# Altium PCB PCB1.PcbDoc
Units mm, origin at the board's own origin, x right, y up, seen from the top; angles counter-clockwise.
Board outline 152.4 x 101.6 mm, 2 copper layers (Top Layer, Bottom Layer), stack 1.98 mm thick; 19 components, 9 nets, 46 pads, 0 vias.
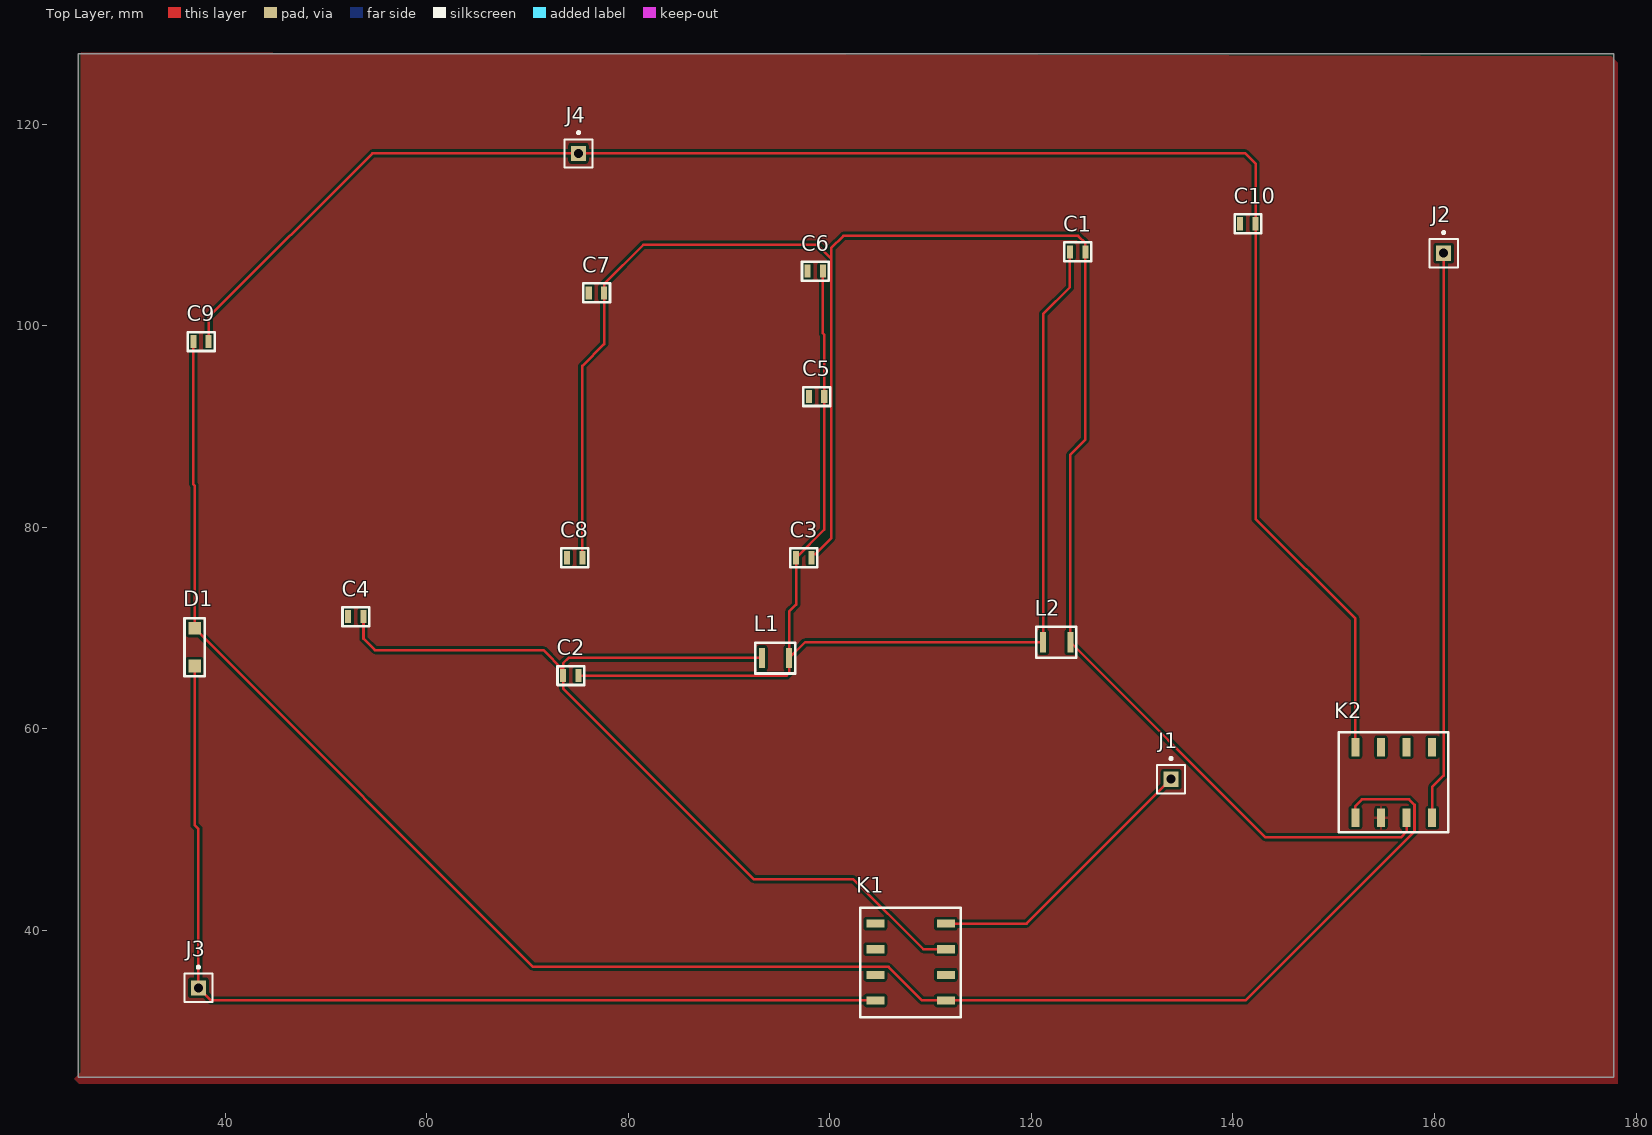
[diagram p0: Top Layer view]
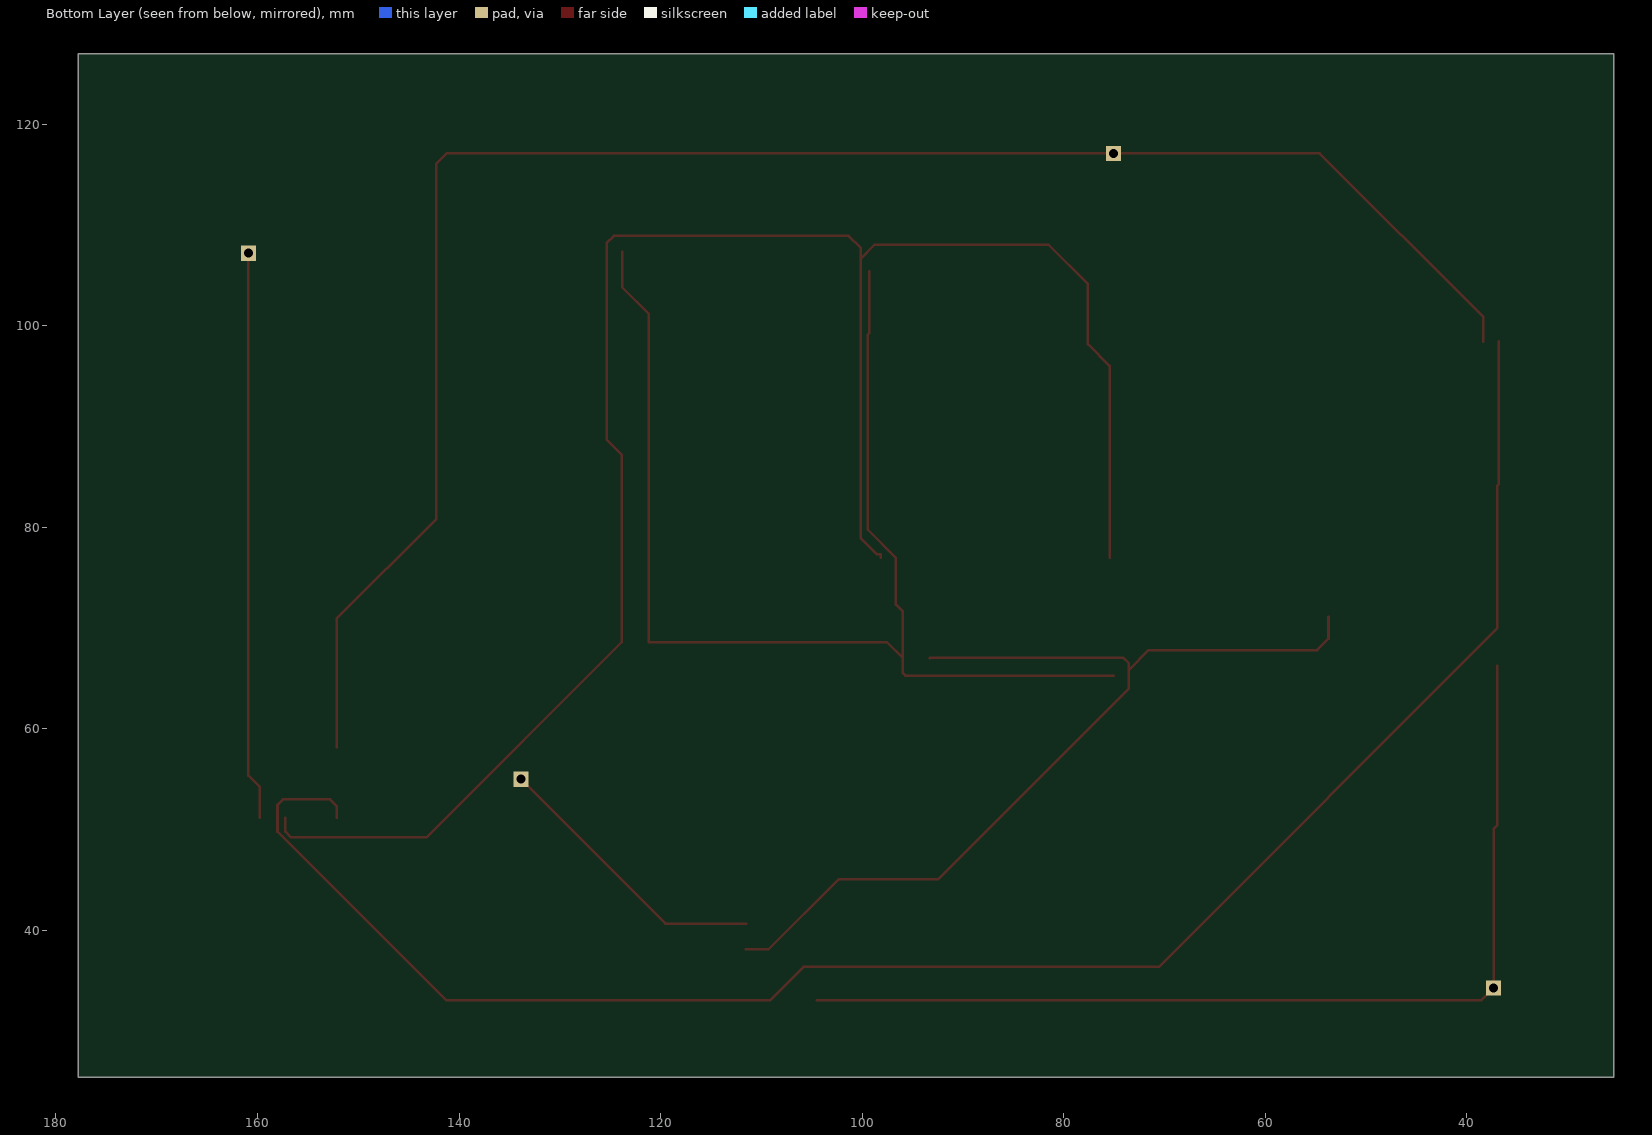
[diagram p1: Bottom Layer view, seen from below]
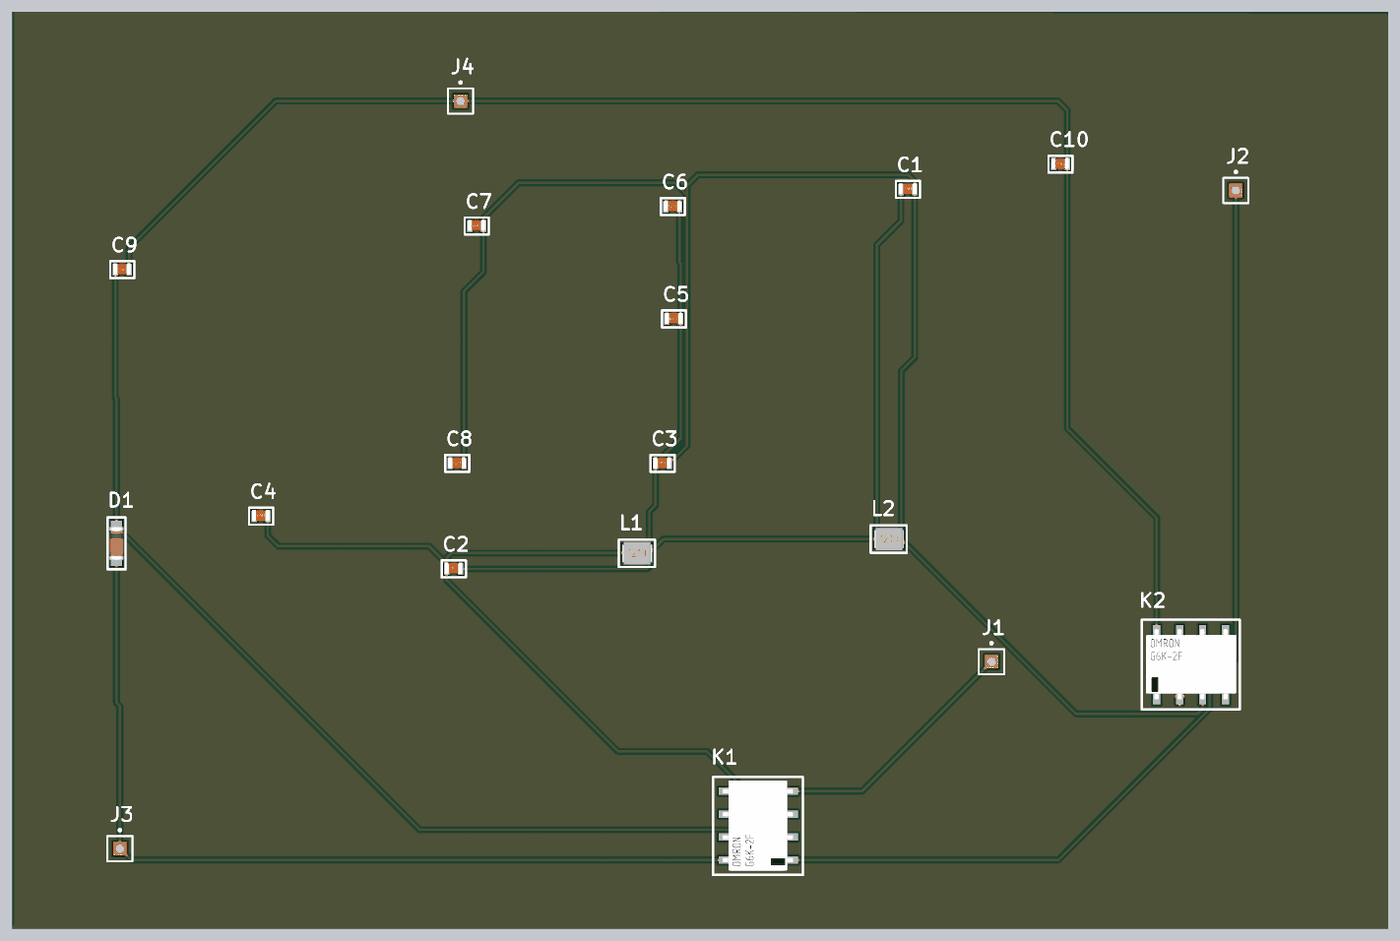
[diagram p2: 3D render of the assembled board from above, using the file's embedded part models]

## Layer stack, top to bottom
Top Solder: solder mask 0.0102, Solder Resist, Dk 3.5
Top Layer: signal copper 0.0356
Dielectric 1: dielectric 1.909, FR-4, Dk 4.8
Bottom Layer: signal copper 0.0356
Bottom Solder: solder mask 0.0102, Solder Resist, Dk 3.5

## Board outline
25.4,25.4 177.8,25.4 177.8,127 25.4,127

## Design rules (kind name [scope] priority, off if disabled: settings)
Clearance [All] p1: gap=0.254 ignorepadtopadclearanceinfootprint=FALSE except(0: Arc-Hole Track-Hole SMDPad-Hole THPad-Hole Via-Hole Fill-Hole Poly-Hole Region-Hole Text-Hole)
PolygonConnect [All] p1: connectstyle=Relief reliefconductorwidth=0.254 reliefentries=4 polygonreliefangle="90 Angle" airgapwidth=0.254
RoutingVias [All] p1: holewidth=0.711 width=1.27 viastyle="Through Hole" minholewidth=0.711 minwidth=1.27 maxholewidth=0.711 maxwidth=1.27
SolderMaskExpansion [All] p1: expansion=0.102
Width [All] p1: maxlimit=0.254 minlimit=0.254 preferedwidth=0.254
30 further rules are at their usual default settings.

## Components (designator, comment, footprint, x,y, rotation, side; value= is the part's Value field where it differs from the comment)
C1 "12пФ-5%-0805" Capacitor_0805 124.587,107.315 r0 top
C2 "68пФ-5%-0805" Capacitor_0805 74.295,65.278 r0 top
C3 "12пФ-5%-0805" Capacitor_0805 97.409,76.962 r0 top
C4 "82пФ-5%-0805" Capacitor_0805 52.959,71.12 r0 top
C5 "150пФ-5%-0805" Capacitor_0805 98.679,92.964 r0 top
C6 "180пФ-5%-0805" Capacitor_0805 98.552,105.41 r0 top
C7 "180пФ-5%-0805" Capacitor_0805 76.835,103.251 r0 top
C8 "18пФ-5%-0805" Capacitor_0805 74.676,76.962 r0 top
C9 "0,1мкФ-5%-0805" Capacitor_0805 37.592,98.425 r0 top
C10 "0,1мкФ-5%-0805" Capacitor_0805 141.478,110.109 r0 top
D1 "1N4148" 1N4148_MELF 36.957,69.977 r270 top
J1 "Socket" PIN1 133.858,54.991 r0 top
J2 "Socket" PIN1 160.909,107.188 r0 top
J3 "Socket" PIN1 37.338,34.29 r0 top
J4 "Socket" PIN1 75.057,117.094 r0 top
K1 "Relay_G6K-2F" Relay_G6K-2F 111.521,33.035 r90 top
K2 "Relay_G6K-2F" Relay_G6K-2F 152.146,51.166 r0 top
L1 "1.08 мГн-5%-1210" Inductor_1210L 94.615,67.056 r0 top
L2 "1.34 мГн-5%-1210" Inductor_1210L 122.508,68.63 r0 top

## Footprints (in the part's own frame and the unit in brackets; to place one, negate y for a bottom-side part, rotate by r counter-clockwise, add the part's x,y. Pads: shape width x height; smd on the part's side, far side on the other; paste and mask are expansions set on the pad)
1N4148_MELF [mm]
  rect 1.25x1.25 smd: 1(0,0) 2(3.75,0)
  silkscreen extent -1,-1 4.75,1, body extent 0.02,-0.8 3.72,0.8, height 1.6
Capacitor_0805 [mm]
  rect 0.6x1.3 smd: 0(-0.762,0) 1(0.762,0)
  silkscreen extent -1.32,-0.94 1.35,0.94, body extent -1.02,-0.56 0.98,0.69, height 1.3
Inductor_1210L [mm]
  rect 0.6x2 smd: 1(-1.35,-0.05) 2(1.35,-0.05)
  silkscreen extent -2.03,-1.57 1.96,1.47, body extent -1.6,-1.3 1.6,1.2, height 2.21
PIN1 [mm] "Connector; Plug"
  rect 1.5x1.5 hole 0.9: 1(0,0)
  silkscreen extent -1.4,-1.4 1.4,2.17
Relay_G6K-2F [mm]
  rect 0.8x1.8 smd: 1(0,0) 2(2.54,0) 3(5.08,0) 4(7.62,0) 5(7.62,7) 6(5.08,7) 7(2.54,7) 8(0,7)
  silkscreen extent -1.65,-1.45 9.2,8.5, body extent -1.2,-0.35 8.8,7.45, height 5.21

## Part data
C1 C3: library part Capasitor_0805, Manufacturer="Murata Electronics", PartNumber=GRM2195C2D120JV01D, Href=https://www.chipdip.ru/product/grm2195c2d120j?from=suggest_product
C2: library part Capasitor_0805, Manufacturer="Murata Electronics", PartNumber=GRM2165C1H680JZ01D, Href=https://www.chipdip.ru/product/grm2165c1h680j?from=suggest_product
C4: library part Capasitor_0805, Manufacturer="Murata Electronics", PartNumber=GRM2165C1H820JZ01D, Href=https://www.chipdip.ru/product/grm2165c1h820j?from=suggest_product
C5: library part Capasitor_0805, Manufacturer="Murata Electronics", PartNumber=GRM2165C1H151JA01D, Href=https://www.chipdip.ru/product/grm2165c1h151j?from=suggest_product
C6 C7: library part Capasitor_0805, Manufacturer="Murata Electronics", PartNumber=GRM2165C1H181JA01D, Href=https://www.chipdip.ru/product/grm2165c1h181j?from=suggest_product
C8: library part Capasitor_0805, Manufacturer="Murata Electronics", PartNumber=GRM2165C1H180JZ01D, Href=https://www.chipdip.ru/product/grm2165c1h180j?from=suggest_product
C9 C10: library part Capasitor_0805, Manufacturer="Murata Electronics", PartNumber=GRM21BR71E104KA01L, Href=https://www.chipdip.ru/product/grm21br71e104ka01l?from=suggest_product
D1: library part Diode_1N4148
L1: library part Inductor_1210, Manufacturer=TAI-TECH, PartNumber="PASU 3225V-102J", Href=https://www.chipdip.ru/product0/8034051211
L2: library part Inductor_1210, Manufacturer=TAI-TECH, PartNumber="PASU 3225V-132J", Href=https://www.chipdip.ru/product0/8033890628
J1 J2 J3 J4: LatestRevisionDate=17-Jul-2002, LatestRevisionNote="Re-released for DXP Platform.", Publisher="Altium Limited"

## Nets (pads, with @x,y where several pads share a name; then routed paths per layer and width w, separated by ;. In a path a pad name is that pad's centre, name@x,y a point inside that pad or via, vN(x,y) a via of type N, cw(c..) or ccw(c..) an arc to the next point about the centre after c; other vN are vias at no path point)
GND: K2.2
NetC1_0: C1.0 C2.1 C3.0 C5.1 C6.1 L1.2 L2.1 | length 128.1
  Top Layer w0.254: C2.1 95.711,65.278 95.965,65.532 L1.2 ; C6.1 99.314,99.238 99.441,99.111 C5.1 99.441,79.756 C3.0 96.647,72.31 95.965,71.628 L1.2 ; C1.0 123.825,103.81 121.158,101.143 L2.1 97.539,68.58 L1.2
NetC1_1: C1.1 C3.1 C7.1 C8.1 K2.3 L2.2 | length 193.8
  Top Layer w0.254: C8.1 75.438,96.012 77.597,98.171 C7.1 77.597,104.14 81.483,108.026 98.781,108.026 100.127,106.68 ; C3.1 98.171,77.318 98.552,77.318 100.127,78.892 100.127,106.68 ; K2.3 157.226,49.784 156.667,49.225 143.213,49.225 L2.2 123.858,87.198 125.349,88.689 C1.1 125.349,108.204 124.638,108.915 101.346,108.915 100.127,107.696 100.127,106.68
NetC2_0: C2.0 C4.1 K1.3 L1.1 | length 94.5
  Top Layer w0.254: C4.1 53.721,68.936 54.864,67.793 71.577,67.793 C2.0@73.533,65.837 ; L1.1 93.265,67.031 74.066,67.031 73.533,66.497 C2.0@73.533,65.837 ; K1.3 109.281,38.115 102.337,45.06 92.481,45.06 73.533,64.008 C2.0 C2.0@73.533,65.837
NetC9_0: C9.0 D1.1 K1.1 K2.1 | length 182
  Top Layer w0.254: C9.0 36.83,84.252 36.957,84.125 D1.1 70.561,36.373 105.816,36.373 109.154,33.035 K1.1 141.264,33.035 158.013,49.784 158.013,52.451 157.48,52.984 152.806,52.984 152.146,52.324 K2.1
NetC9_1: C9.1 C10.1 J4.1 K2.8 | length 175.5
  Top Layer w0.254: C9.1 38.354,100.838 54.61,117.094 J4.1 141.224,117.094 142.24,116.078 C10.1 142.24,80.823 152.146,70.917 K2.8
NetD1_2: D1.2 J3.1 K1.8 | length 99.8
  Top Layer w0.254: D1.2 36.957,50.444 37.338,50.063 J3.1 38.593,33.035 K1.8
NetJ1_1: J1.1 K1.4 | length 28.3
  Top Layer w0.254: K1.4 119.522,40.655 J1.1
NetJ2_1: J2.1 K2.4 | length 56.5
  Top Layer w0.254: K2.4 159.766,54.204 160.909,55.347 J2.1
pads on no net: C4.0 C5.0 C6.0 C7.0 C8.0 C10.0 K1.2 K1.5 K1.6 K1.7 K2.5 K2.6 K2.7

## Polygon pours and split planes (outlines as drawn)
GND on Top Layer "Top Layer-No Net" (solid, pour order 2): 25.654,127.127 25.654,25.908 25.019,25.273 25.527,24.765 178.181,24.765 178.181,126.111 177.546,126.746